# Altium PCB 板3.PcbDoc (part 1 of 3)
Units mm, origin at the board's own origin, x right, y up, seen from the top; angles counter-clockwise.
Board outline 152.4 x 101.6 mm, 4 copper layers (Top Layer, VCC, GND, Bottom Layer); 152 components, 486 nets, 1233 pads, 480 vias.
Unrouted connection lines stored in the file: 1.
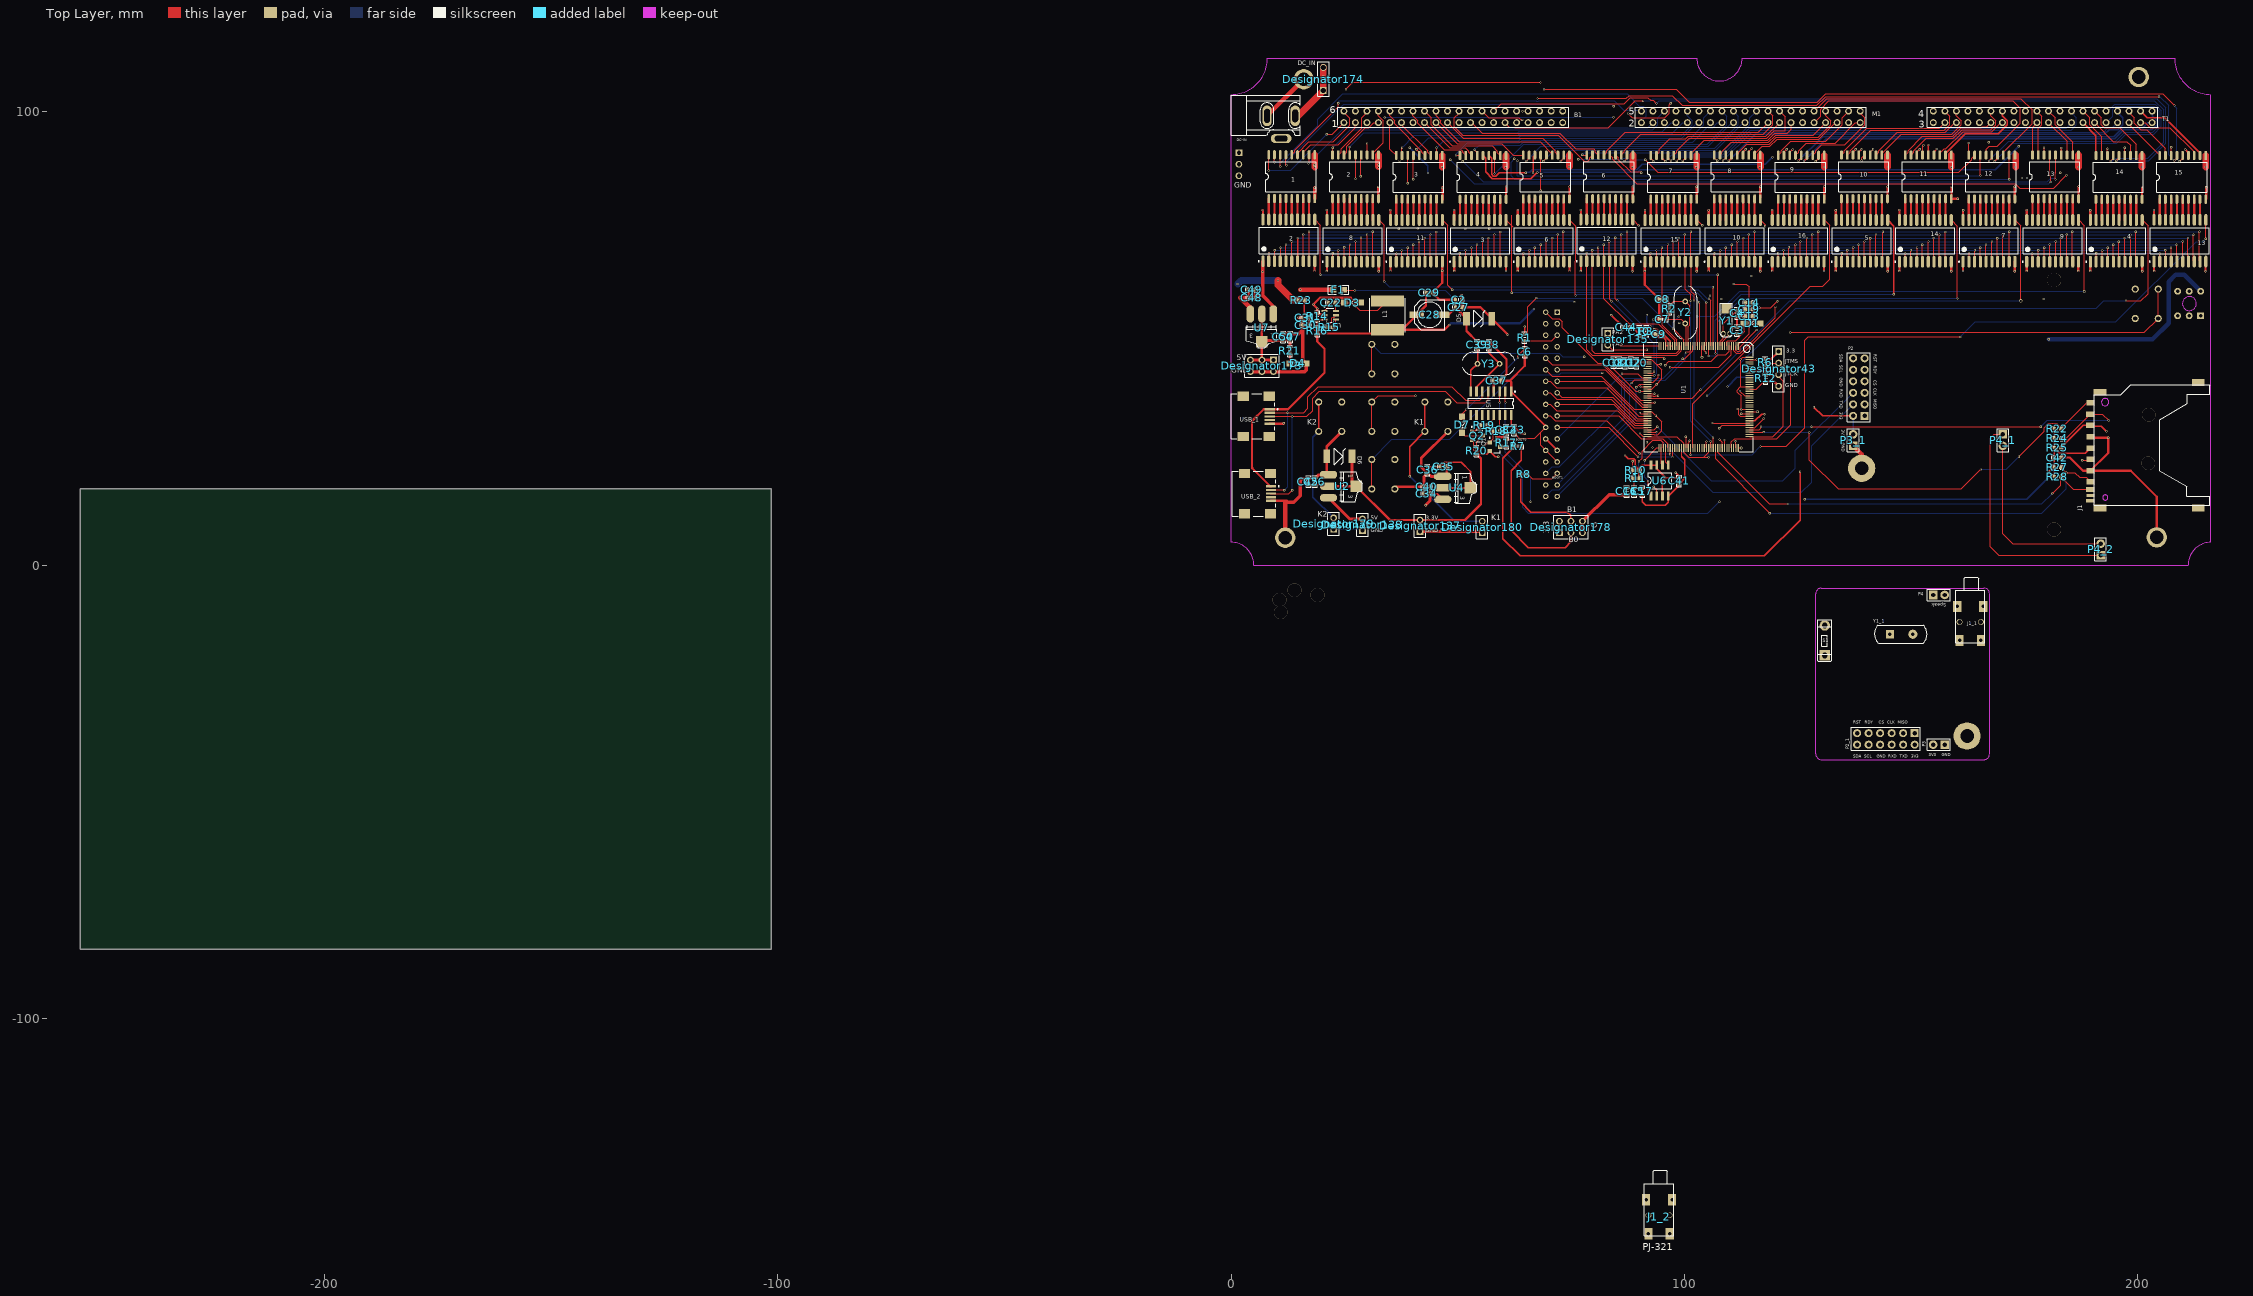
[diagram p0: Top Layer view]
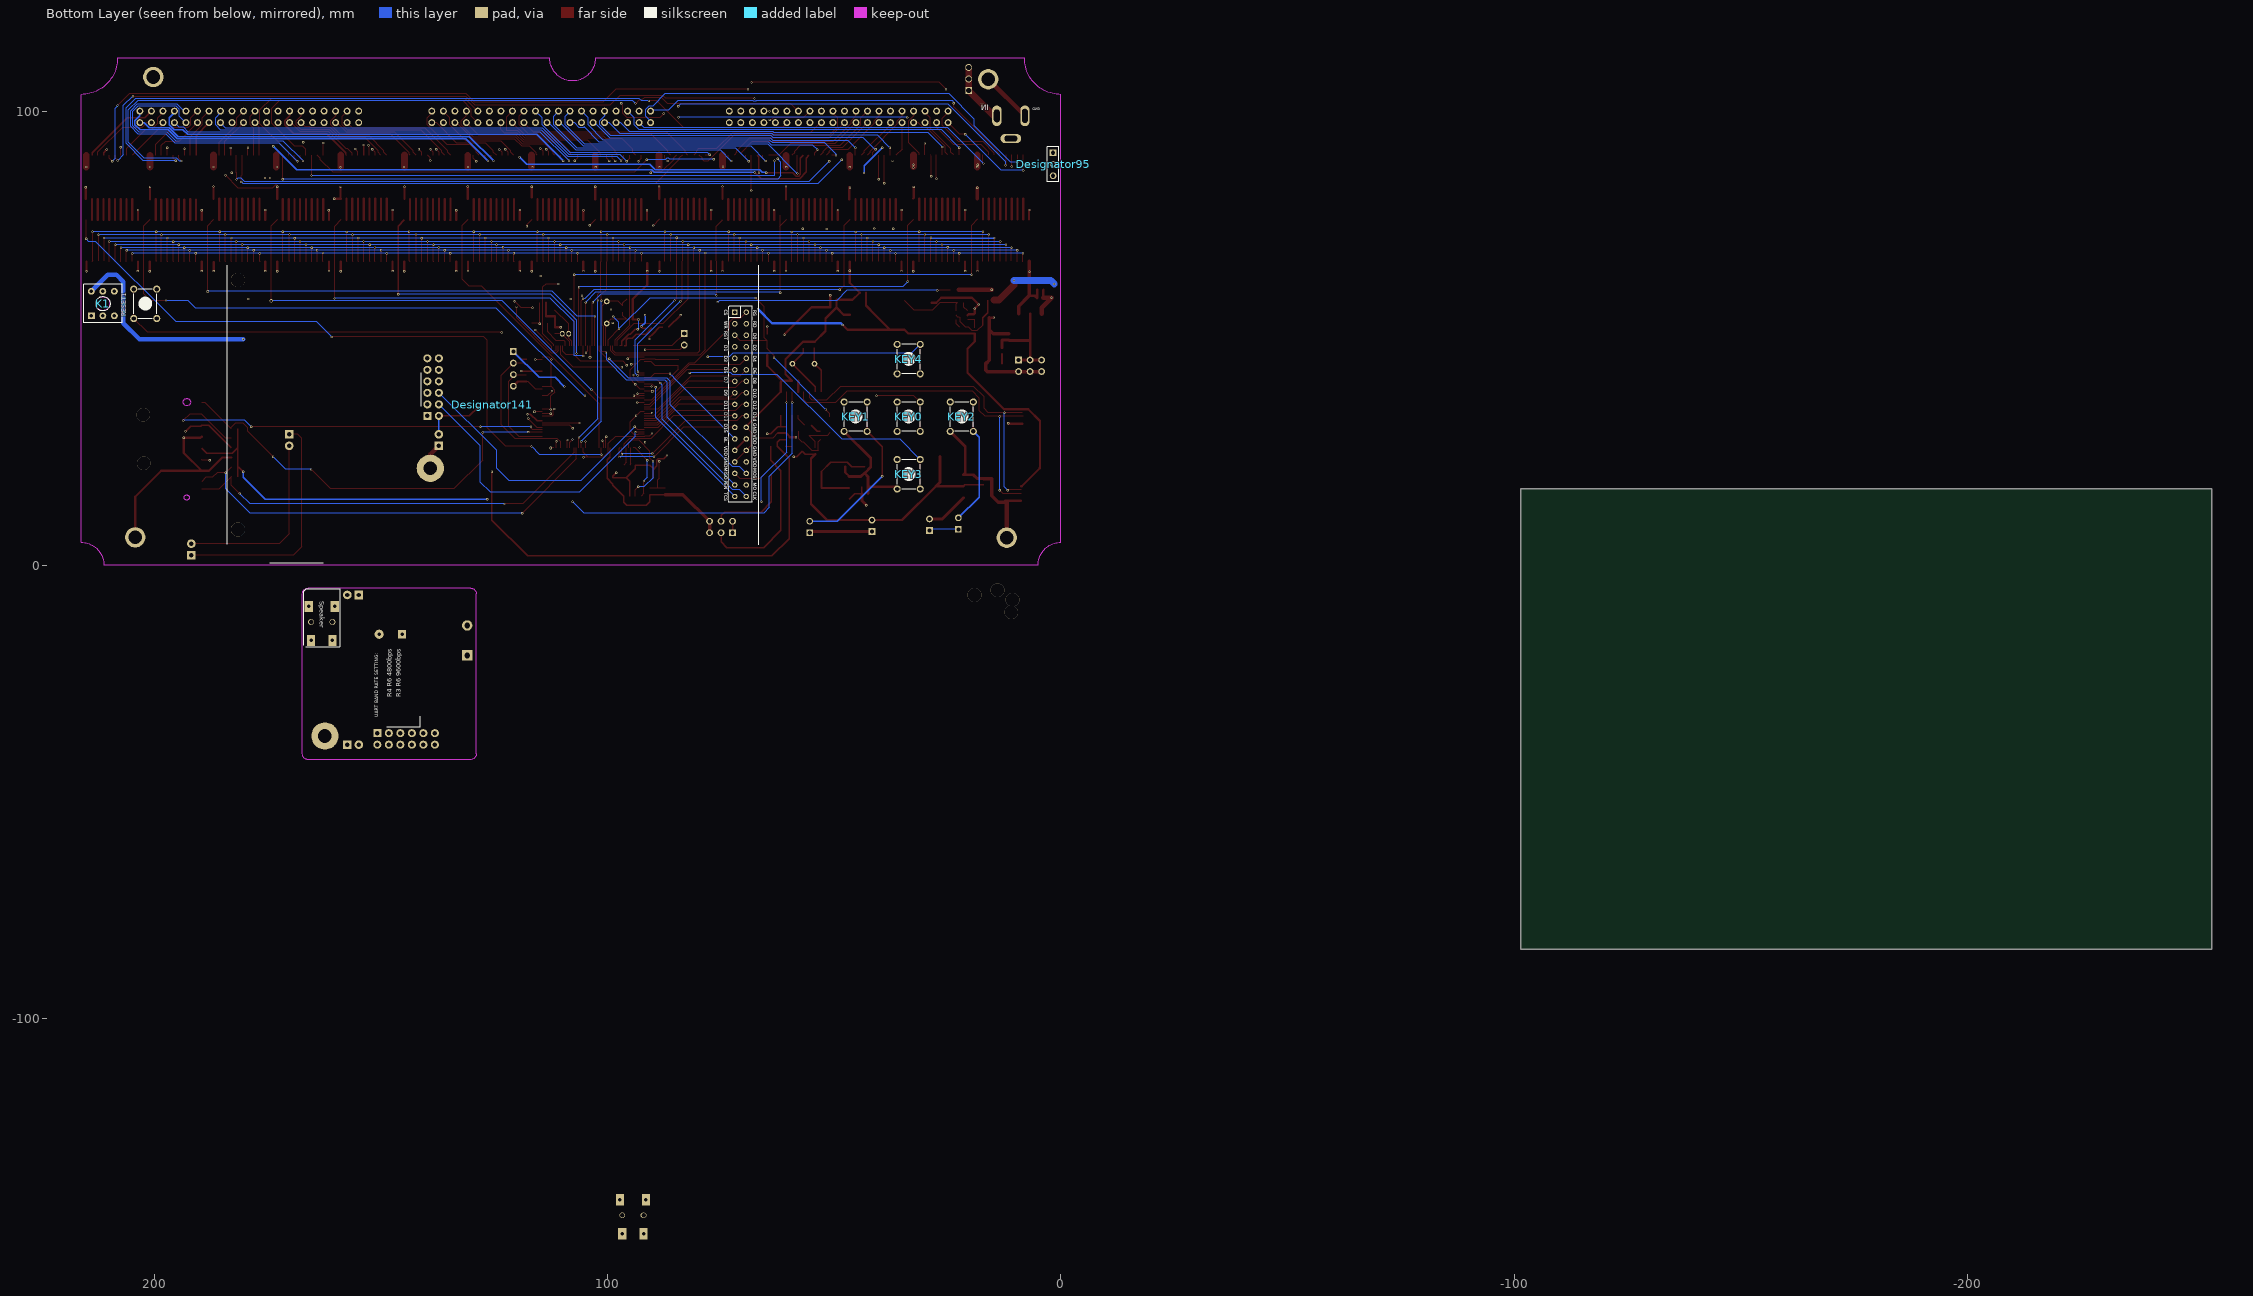
[diagram p1: Bottom Layer view, seen from below]
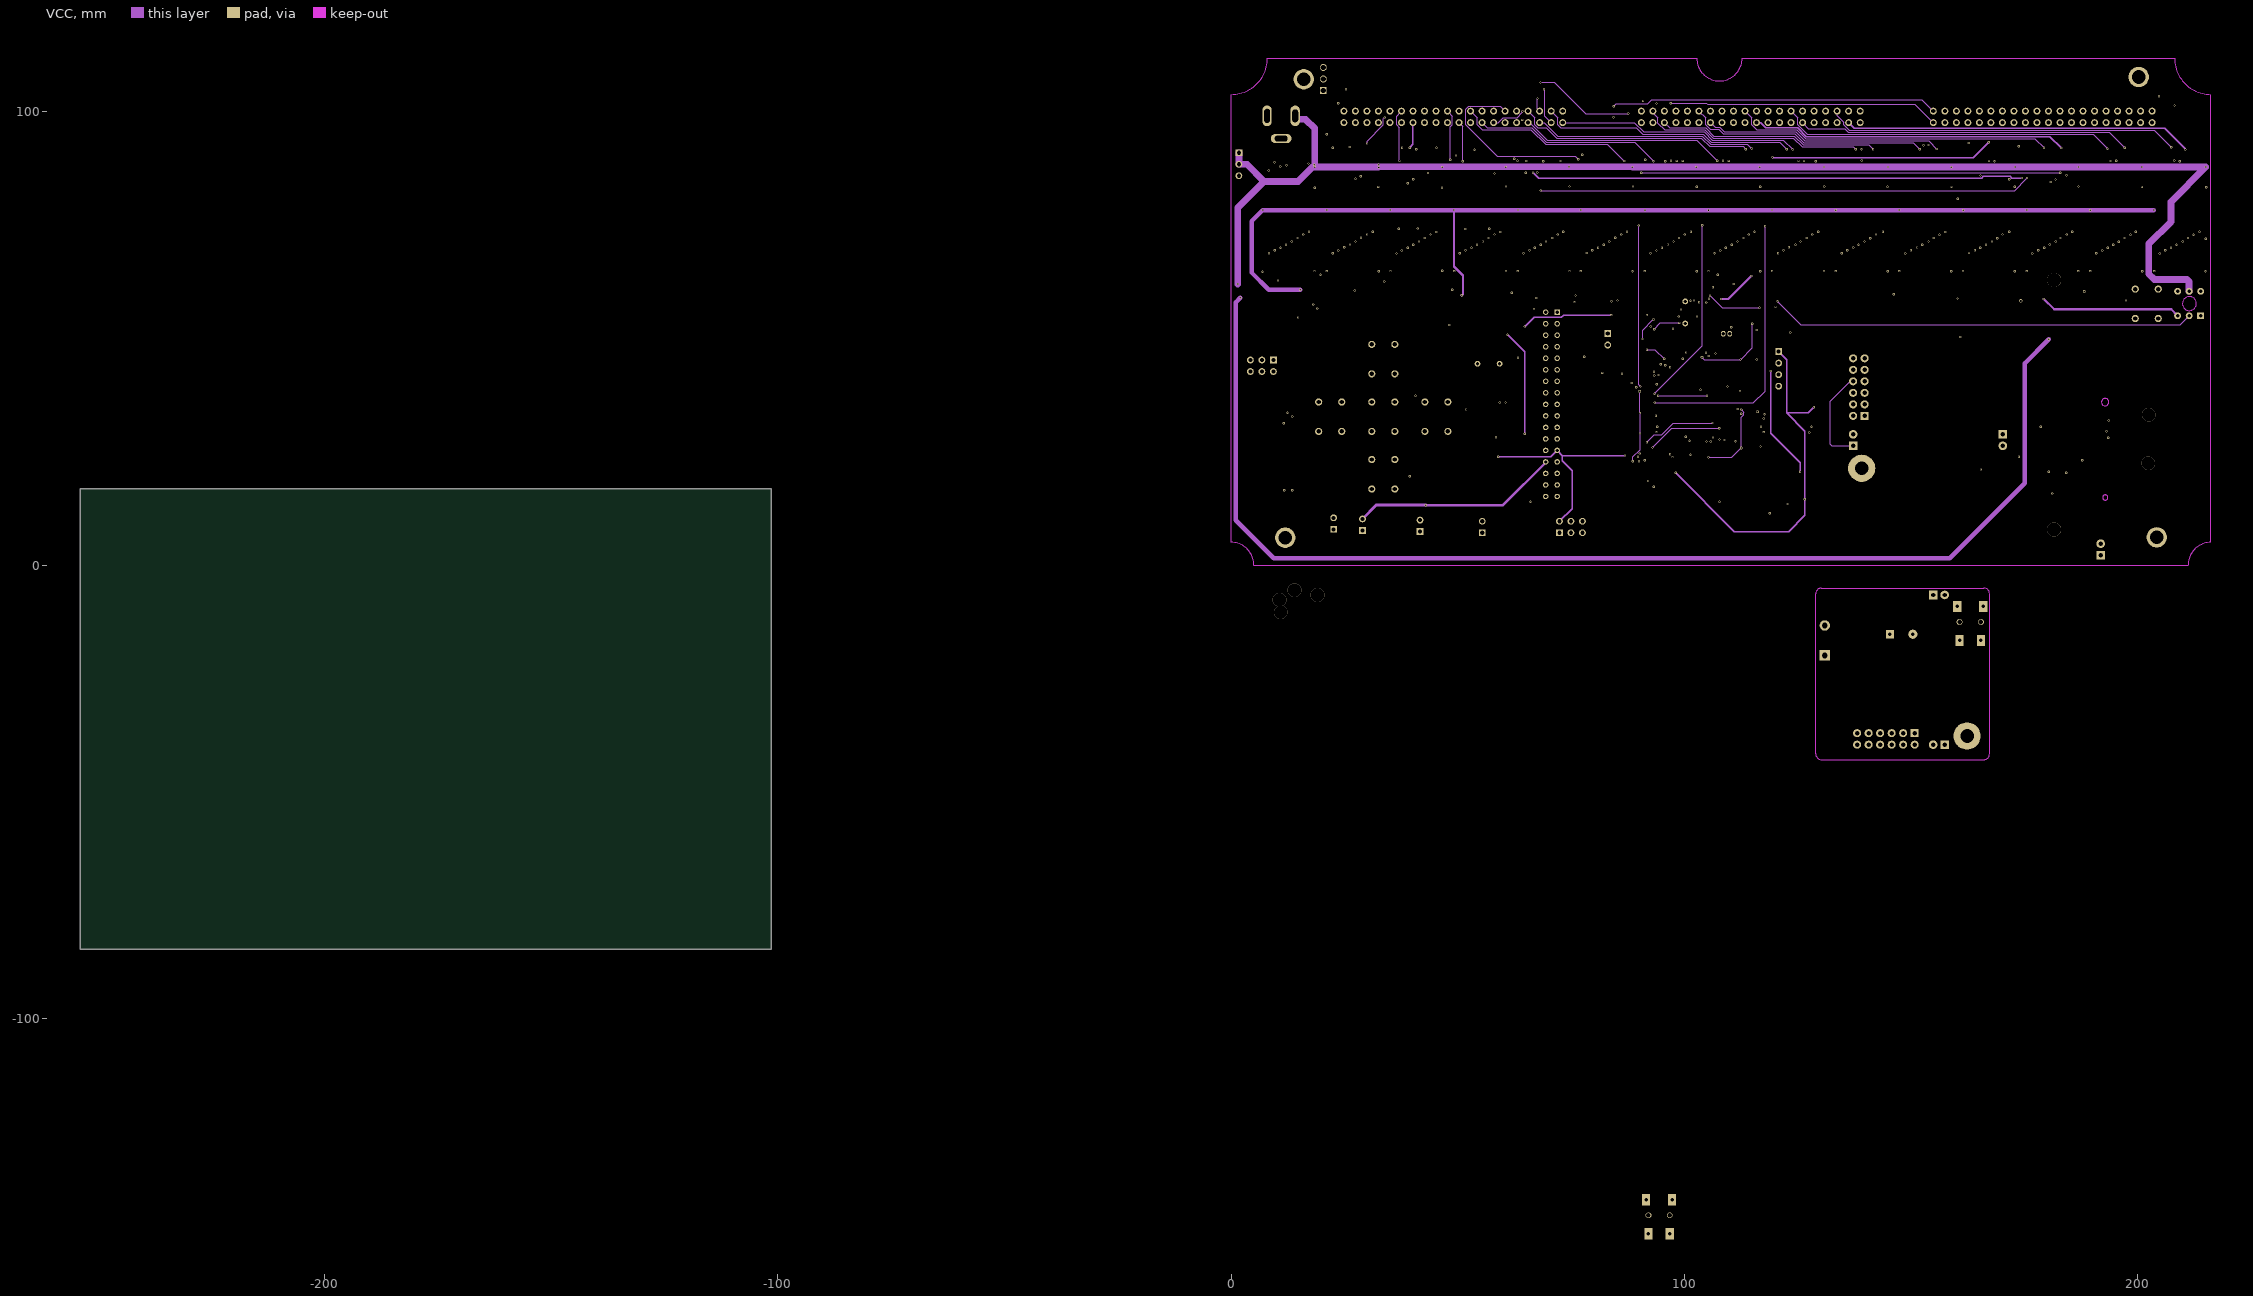
[diagram p2: VCC]
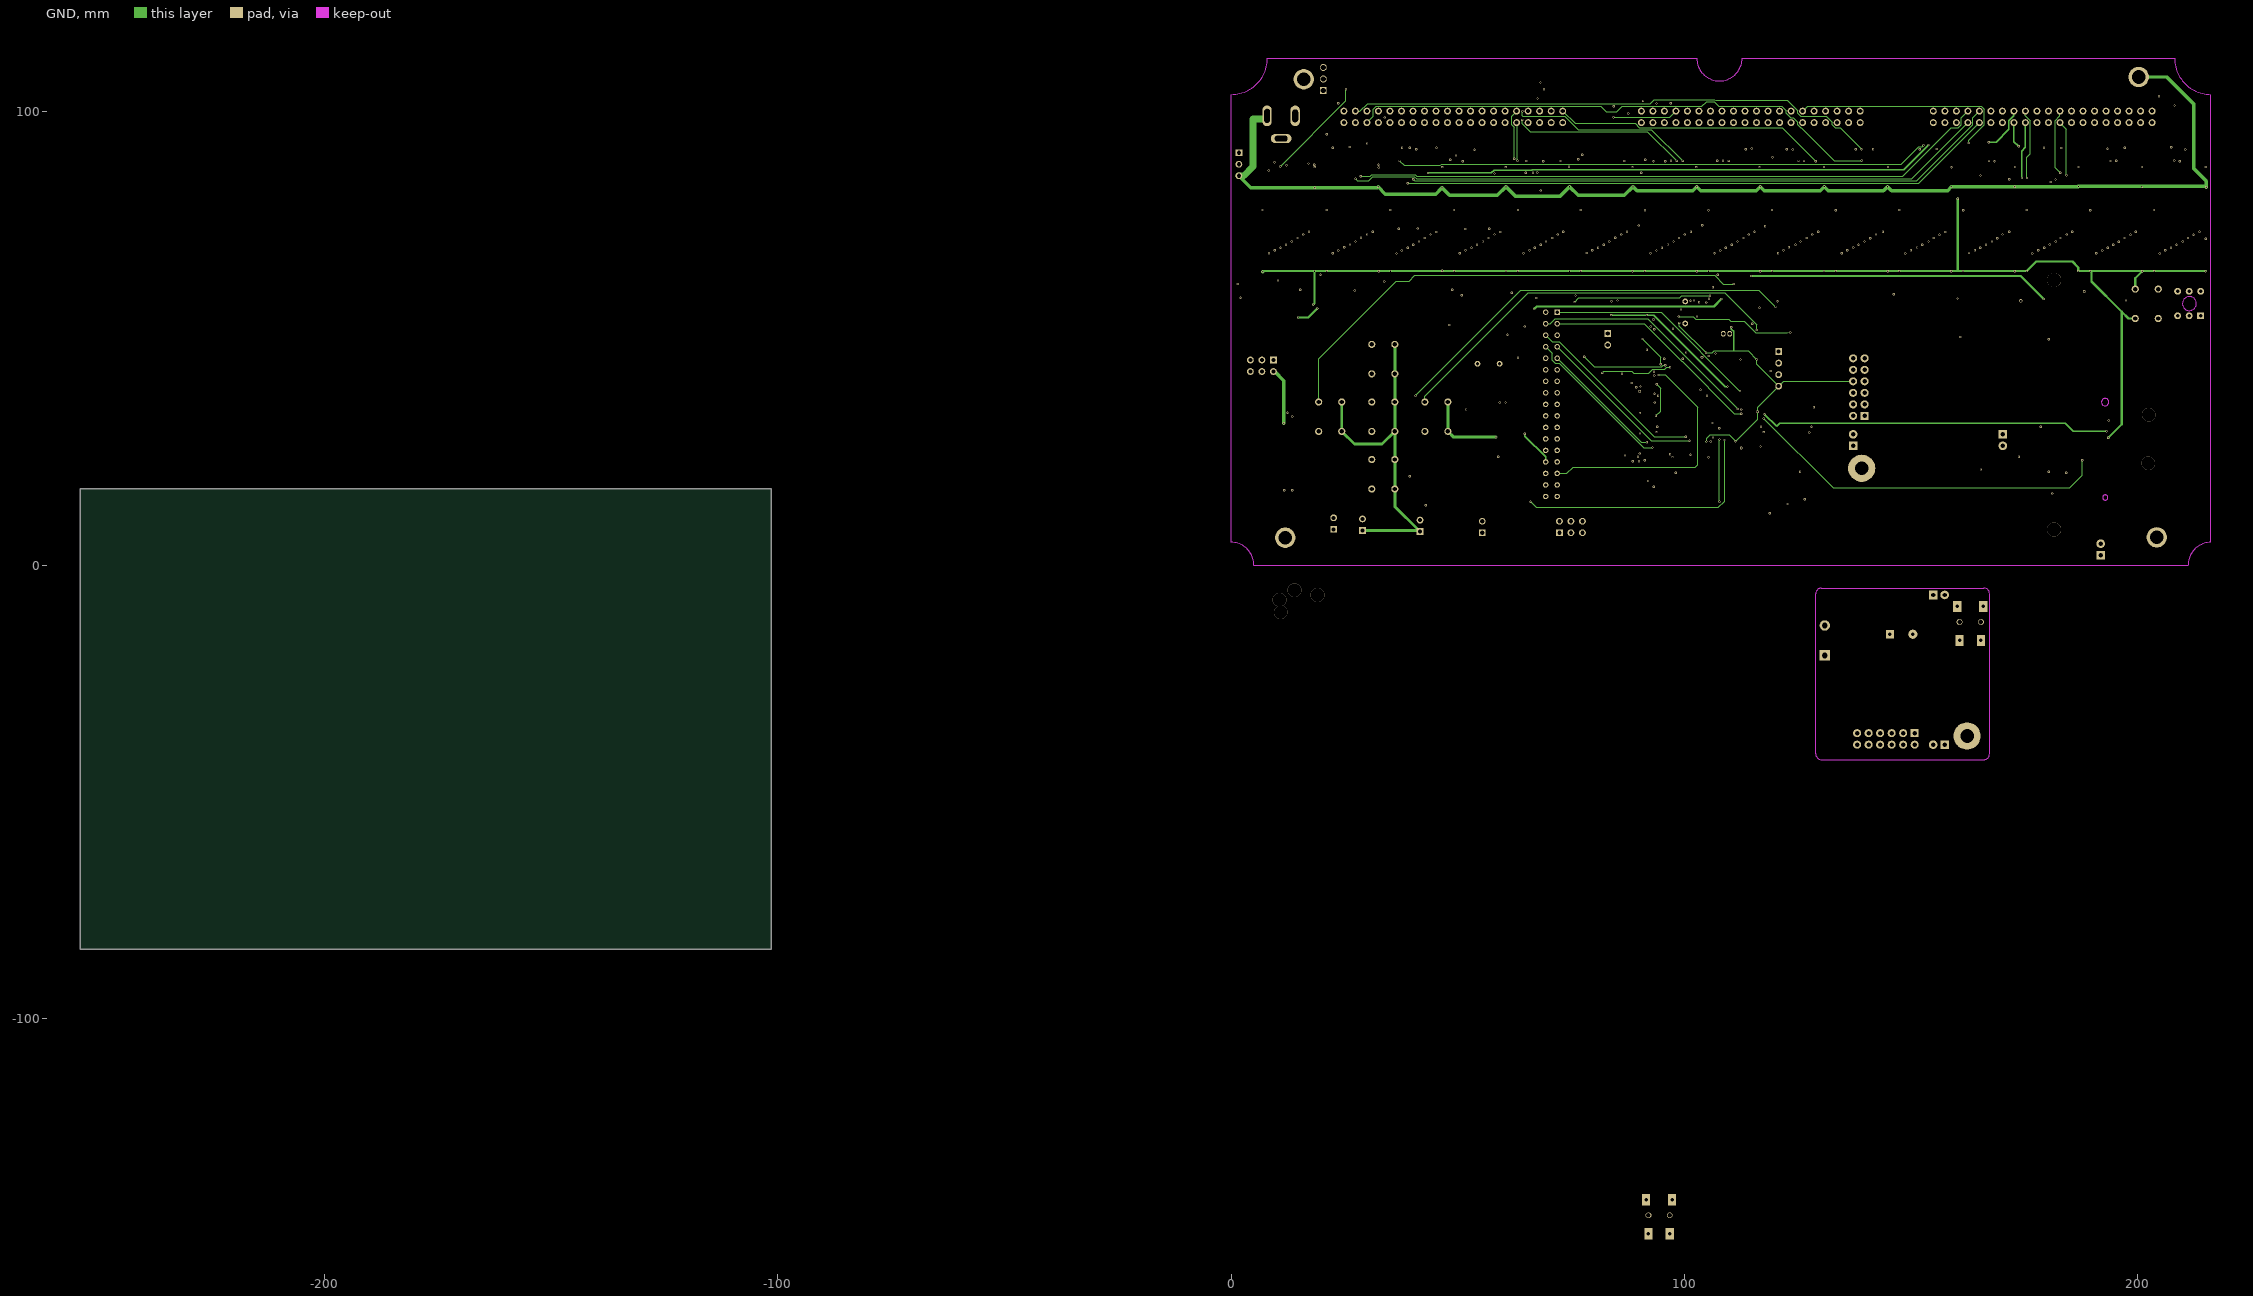
[diagram p3: GND]

## Layer stack, top to bottom
Top Layer: signal copper 0.0356
Dielectric: core 0.32, FR-4, Dk 4.8
VCC: signal copper 0.0356
Dielectric: prepreg 0.32, FR-4, Dk 4.8
GND: signal copper 0.0356
Dielectric: core 0.32, FR-4, Dk 4.8
Bottom Layer: signal copper 0.0356

## Board outline
-253.83,-84.735 -101.43,-84.735 -101.43,16.865 -253.83,16.865

## Design rules (kind name [scope] priority, off if disabled: settings)
Clearance Clearance_1 [InNet('GND')] p1: gap=0.2
Clearance [All] p2: gap=0.2
ComponentClearance [All] p1: gap=0 collisioncheckmode=3 verticalgap=0 showdistances=FALSE
FabricationTestPointUsage TestPointUsage [All] p1: valid=0 allowmultiple=FALSE
FabricationTestpoint Testpoint [(IsPad And (OnTopLayer Or OnBottomLayer))] p1: side=3 testpointundercomponent=TRUE minsize=1.016 maxsize=2.54 preferedsize=1.524 minholesize=0 maxholesize=1.016 preferedholesize=0.813 testpointgrid=0.025 allowsidetop=TRUE allowsidebottom=TRUE usegrid=TRUE gridtolerance=0
PolygonConnect [All] p1: connectstyle=Relief reliefconductorwidth=0.254 reliefentries=4 polygonreliefangle="90 Angle" airgapwidth=0.254
RoutingCorners [All] p1: cornerstyle=Round minsetback=2.54 maxsetback=2.54
RoutingVias [All] p1: holewidth=0.3 width=0.5 viastyle="Through Hole" minholewidth=0.3 minwidth=0.5 maxholewidth=0.7 maxwidth=0.7
SolderMaskExpansion [All] p1: expansion=0.102
Width [All] p1: maxlimit=5 minlimit=0.2 preferedwidth=3 toplayer_prefwidth=0.2 midlayer1_minwidth=0.254 midlayer1_maxwidth=3 midlayer1_prefwidth=0.254 midlayer2_minwidth=0.254 midlayer2_maxwidth=3 midlayer2_prefwidth=0.254 minimp=50.000000 maximp=50.000000 favimp=50.000000
24 further rules are at their usual default settings.

## Classes and differential pairs
component class SHEET2: 2 3 4 5 6 8 9 10 11 12 13 14 15 16 573_1 573_2 573_3 573_4 573_5 573_6 573_7 573_8 573_9 573_10 573_11 573_12 573_13 573_14 573_15 B DY4 Jzong M T
component class SHEET3: C83 C84 C85 C86 C87 C88 C89 C90 C92 C93 C94 C95 C96 C97 C98 C99 D3 D5 D6 D7 DC_IN K1 L1 Q2 R67 R68 R69 R70 R71 U16 U17 U18 U19 USB_232
component class Sheet4: BEEP C41 C42 C44 CAN DS0 DS1 KEY0 KEY1 KEY2 "KEY UP" P13 P14 R22 R24 R25 R27 R28 SYS TPAD TPAD1 U6 U15 USB
component class SHEET1: 2.4/2.8LCD BAT BOOT C2 C3 C4 C7 C8 C9 C10 C11 D1 D2 JTAG R2 R3 RESET Y1

## Components (designator, comment, footprint, x,y, rotation, side; value= is the part's Value field where it differs from the comment)
1 "uln2803" sol-18 8.28,80.823 r90 top (schematic designator FD1)
2 "74HC573" SO20_M 12.725,71.603 r90 top
2 "uln2803" sol-18 22.352,80.797 r90 top (schematic designator FD7)
3 "74HC573" SO20_M 54.889,71.501 r90 top
3 "uln2803" sol-18 36.398,80.696 r90 top (schematic designator FD10)
4 "74HC573" SO20_M 195.206,71.501 r90 top
4 "uln2803" sol-18 50.47,80.67 r90 top (schematic designator FD2)
5 "74HC573" SO20_M 139.079,71.501 r90 top
5 "uln2803" sol-18 64.44,80.747 r90 top (schematic designator FD5)
6 "74HC573" SO20_M 68.921,71.501 r90 top
6 "uln2803" sol-18 78.435,80.772 r90 top (schematic designator FD11)
7 "74HC573" SO20_M 167.142,71.501 r90 top
7 "uln2803" sol-18 92.532,80.696 r90 top (schematic designator FD14)
8 "74HC573" SO20_M 26.825,71.501 r90 top
8 "uln2803" sol-18 106.553,80.747 r90 top (schematic designator FD9)
9 "74HC573" SO20_M 181.174,71.501 r90 top
9 "uln2803" sol-18 120.65,80.721 r90 top (schematic designator FD15)
10 "74HC573" SO20_M 111.016,71.501 r90 top
10 "uln2803" sol-18 134.595,80.772 r90 top (schematic designator FD4)
11 "74HC573" SO20_M 40.857,71.501 r90 top
11 "uln2803" sol-18 148.666,80.772 r90 top (schematic designator FD13)
12 "74HC573" SO20_M 82.855,71.603 r90 top
12 "uln2803" sol-18 162.687,80.747 r90 top (schematic designator FD6)
13 "74HC573" SO20_M 209.245,71.526 r90 top
13 "uln2803" sol-18 176.733,80.772 r90 top (schematic designator FD8)
14 "74HC573" SO20_M 153.111,71.501 r90 top
14 "uln2803" sol-18 190.729,80.67 r90 top (schematic designator FD3)
15 "74HC573" SO20_M 96.984,71.501 r90 top
15 "uln2803" sol-18 204.775,80.67 r90 top (schematic designator FD12)
16 "74HC573" SO20_M 125.047,71.501 r90 top
B1 "dubangxian" 杜邦线插脚 24.859,100.101 r0 top
C2 "104" 0603P 50.165,58.496 r0 top
C3 "10" 0603P 111.582,51.74 r270 top
C4 "10" 0603P 111.582,55.524 r90 top
C6 "104" 0603P 64.77,47.015 r90 top
C7 "22" 0603P 95.072,54.153 r0 top
C8 "22" 0603P 95.079,58.649 r0 top
C9 "10uF" 0603P 94.31,50.876 r180 top
C10 "104" 0603P 90.043,51.587 r90 top
C11 "104" 0603P 85.598,44.628 r90 top
C12 "104" 0603P 88.138,44.628 r90 top
C13 "104" 0603P 114.224,54.839 r180 top
C14 "104" 0603P 114.224,57.836 r180 top
C15 "104" 0603P 88.9,16.231 r270 top
C16 "104" 0603P 87.249,16.231 r270 top
C17 "104" 0603P 90.678,16.231 r270 top
C18 "104" 0603P 84.328,44.628 r90 top
C19 "104" 0603P 114.224,56.388 r180 top
C20 "104" 0603P 89.408,44.602 r90 top
C21 "104" 0603P 86.893,44.602 r90 top
C22 "103" 0603P 22.098,57.887 r0 top
C26 "104" 0603P 18.44,18.365 r270 top
C27 "104" 0603P 50.165,56.845 r0 top
C28 "220uF" CC6.56.5 43.764,55.194 r0 top
C29 "104" 0603P 43.688,60.071 r180 top
C30 "104" 0603P 16.485,52.934 r0 top
C31 "104" 0603P 16.485,54.508 r0 top
C32 "104" 0603P 60.681,29.794 r270 top
C34 "104" 0603P 43.18,15.748 r0 top
C35 "104" 0603P 46.838,21.667 r180 top
C36 "10uf" 0603P 43.332,20.981 r90 top
C37 "104" 0603P 58.623,40.665 r180 top
C38 "22" 0603P 56.845,48.539 r270 top
C39 "22" 0603P 54.28,48.539 r270 top
C40 "104" 0603P 43.18,17.272 r0 top
C41 "104" 0603P 98.806,18.542 r270 top
C42 "104" 0603P 182.245,23.693 r180 top
C43 "10u" 0603P 62.382,29.82 r270 top
C44 "104" 0603P 87.122,52.4 r180 top
C45 "104" 0603P 17.043,18.365 r270 top (schematic designator C26)
C47 "104" 0603P 12.954,50.292 r90 top (schematic designator C26)
C48 "104" 0603P 4.572,58.928 r0 top (schematic designator C26)
C49 "104" 0603P 4.488,60.706 r0 top (schematic designator C26)
C50 "106" 0603P 11.43,50.292 r90 top (schematic designator C26)
D1 "1N4148" DIODE_SOP 116.688,53.289 r180 top
D3 "SS14" DIODE_SOP 28.499,57.861 r180 top
D4 "SS14" DIODE_SOP 12.954,44.45 r0 top (schematic designator D3)
D5 "SMBJ5.0A" SMBJ 54.559,54.356 r0 top
D6 "SMBJ5.0A" SMBJ 23.749,23.953 r0 top
D7 "1N4148" DIODE_SOP 50.927,32.715 r270 top
DC_IN "POWER" DC10B 3.472,94.742 r0 top
Designator43 "ss14" HDR1X4 120.752,47.066 r270 top
Designator95 "" HDR1X3#1 1.694,90.932 r270 bottom
Designator135 "" HDR1X2#1 83.058,51.054 r270 top
Designator137 "" HDR1X2#1 41.656,7.366 r90 top
Designator138 "" HDR1X2#1 28.956,7.62 r90 top
Designator141 "" db2*17-4.3 71.907,55.753 r270 bottom locked
Designator173 "" HDR2X3 9.314,45.212 r180 top
Designator174 "" HDR1X3#2 20.32,104.648 r90 top
Designator178 "" HDR2X3 72.39,7.112 r0 top
Designator179 "" HDR1X2#1 22.606,7.874 r90 top
Designator180 "" HDR1X2#1 55.372,7.112 r90 top
F1 "500MA" 0805 22.522,60.706 r0 top
J1 "SDCARD" SDCARD_L 189.484,33.274 r90 top
J1_1 "PJ-325C" PJ-321 162.941,-11.684 r270 top (schematic designator J1)
J1_2 "PJ-321" PCBComponent_1 828.497,503.149 r0 top (schematic designator J1)
K1 "BUTTON" BTN8.5*8.5 213.817,54.966 r90 bottom
KEY0 "KEY_M" KEY_M 36.093,29.464 r90 bottom
KEY1 "KEY_M" KEY_M 47.803,29.464 r90 bottom
KEY2 "KEY_M" KEY_M 24.384,29.464 r90 bottom
KEY3 "KEY_M" KEY_M 36.093,16.764 r90 bottom (schematic designator KEY0)
KEY4 "KEY_M" KEY_M 36.093,42.164 r90 bottom (schematic designator KEY0)
L1 "4.7uH" L_SOP74 34.468,51.892 r90 top
M1 "dubangxian" 杜邦线插脚 90.467,100.101 r0 top
P2 "Header 6X2A" HDR2X6_CEN 139.7,32.893 r90 top locked
P2_1 "Header 6X2A" HDR2X6_CEN 150.749,-37.084 r180 top (schematic designator P2)
P3 "Header 2" HDR1X2#2 157.353,-39.624 r180 top
P3_1 "Header 2" HDR1X2#2 137.16,26.289 r90 top locked (schematic designator P3)
P4 "Header 2" HDR1X2#2 154.813,-6.604 r0 top
P4_1 "Header 2" HDR1X2#2 170.18,28.829 r270 top locked (schematic designator P4)
P4_2 "Header 2" HDR1X2#2 191.77,2.159 r90 top locked (schematic designator P4)
Q1 "S8550" SOT-23R 58.064,26.086 r270 top
Q2 "S8050" SOT-23R 54.153,28.524 r270 top
R1 "10K" 0603P 64.719,50.14 r90 top
R2 "1M" 0603P 96.622,56.464 r90 top
R3 "10R" 0603P 91.592,51.562 r90 top
R6 "10K" 0603P 117.78,44.679 r270 top
R7 "10K" 0603P 63.246,26.162 r0 top
R8 "10K" 0603P 64.516,20.066 r180 top (schematic designator R7)
R10 "0" 0603P 89.256,20.93 r180 top
R11 "0" 0603P 89.256,19.126 r180 top
R12 "10K" 0603P 117.856,41.148 r90 top
R14 "9.53K" 0603P 18.999,54.813 r90 top
R15 "100K" 0603P 21.641,52.451 r0 top
R16 "49.9K" 0603P 18.999,51.664 r90 top
R17 "1K" 0603P 60.706,26.924 r90 top
R18 "1K" 0603P 58.522,29.515 r180 top
R19 "1K" 0603P 55.778,30.785 r180 top
R20 "10K" 0603P 54.127,25.146 r90 top
R21 "100K" 0603P 12.954,47.244 r270 top (schematic designator R15)
R22 "47k" 0603P 182.245,30.048 r180 top
R23 "0" 0603P 15.41,58.42 r180 top (schematic designator R14)
R24 "47k" 0603P 182.245,27.93 r180 top
R25 "47k" 0603P 182.245,25.811 r180 top
R27 "47k" 0603P 182.245,21.575 r180 top
R28 "47k" 0603P 182.245,19.456 r180 top
RESET1 "KEY_M" KEY_M 204.47,54.356 r90 bottom
S1 "KEY_" KEY2 130.937,-16.764 r90 top
T1 "dubangxian" 杜邦线插脚 154.856,100.101 r0 top
U1 "STM32F103ZET6" LQFP144 111.822,48.303 r270 top
U2 "AMS1117-3.3" AMS1117 21.463,19.914 r270 top
U3 "MP2359" SOT-23-6 20.574,56.032 r0 top
U4 "AMS1117-1.8" AMS1117 46.685,19.559 r270 top
U5 "CH340G" SOP16M 57.302,35.636 r180 top
U6 "W25Q128" SOIC-8 92.583,15.189 r90 top
U7 "AMS1117-5.0" AMS1117 9.314,55.372 r180 top (schematic designator U2)
USB_1 "USB" USB/SM0.8-6H5 0.678,32.766 r180 top
USB_2 "USB" USB/SM0.8-6H5 0.932,15.748 r180 top (schematic designator USB_1)
Y1 "32.768K" XTAL32 108.534,51.029 r90 top
Y1_1 "XTAL_1" XTAL 147.803,-15.265 r0 top (schematic designator Y1)
Y2 "8MHz" XTAL_US 100.152,53.264 r90 top
Y3 "12.288MHz" XTAL_US 59.207,44.399 r180 top

## Footprints (in the part's own frame and the unit in brackets; to place one, negate y for a bottom-side part, rotate by r counter-clockwise, add the part's x,y. Pads: shape width x height; smd on the part's side, far side on the other; paste and mask are expansions set on the pad)
0603P [mil]
  rect 30x30 smd: 1(-27,0) 2(27.5,-0.06)
  silkscreen extent -50,-20 50,20
0805 [mil]
  rect 60x50 smd: 1(0,0) 2(90,0)
  silkscreen extent -45,-40 135,40
AMS1117 [mil]
  oct 65x150 smd: 1(0.03,-0.06)
  oval 65x150 smd: 2(100.03,-0.06) 3(200.03,-0.06)
  rect 100x100 smd: 4(100.03,239.94)
  silkscreen extent -26,100 234,293
BTN8.5*8.5 [mm]
  rect 1.5x1.5 hole 0.8: 1(0,0)
  round 1.5 hole 0.8: 2(0,-2.54) 3(0,-5.08) 4(5.4,-5.08) 5(5.4,-2.54) 6(5.4,0)
  silkscreen extent -1.55,-6.79 6.95,1.71
CC6.56.5 [mm]
  rect 3.2x1.5 smd: 1(-2.794,0) 2(2.8,0)
  silkscreen extent -3.3,-3.3 3.3,3.3
db2*17-4.3 [mm]
  rect 1.2x1.2 hole 0.7: 1(-0.002,0.006)
  round 1.2 hole 0.7: 2(-0.002,2.546) 3(2.538,0.006) 4(2.538,2.546) 5(5.08,0) 6(5.078,2.546) 7(7.62,0) 8(7.62,2.54) 9(10.158,0.006) 10(10.158,2.546) 11(12.698,0.006) 12(12.698,2.546) 13(15.238,0.006) 14(15.238,2.546) 15(17.778,0.006) 16(17.778,2.546) 17(20.318,0.006) 18(20.318,2.546) 19(22.858,0.006) 20(22.858,2.546) 21(25.398,0.006) 22(25.398,2.546) 23(27.938,0.006) 24(27.938,2.546) 25(30.478,0.006) 26(30.478,2.546) 27(33.018,0.006) 28(33.018,2.546) 29(35.558,0.006) 30(35.558,2.546) 31(38.098,0.006) 32(38.098,2.546) 33(40.638,0.006) 34(40.638,2.546)
  round 3.1 hole 3.1: ""(-7.125,-109.596) ""(47.925,-109.596)
  silkscreen extent -10.4,-111.89 51.25,5.33
DC10B [mil]
  oval 80x180 hole 50 slot 110 at 90 deg: 1(419.09,170)
  oval 80x180 hole 50 slot 120 at 90 deg: 2(175,170)
  oval 180x80 hole 50 slot 110 at 0 deg: 3(297.05,-26.85)
  silkscreen extent -138,0 465,350
DIODE_SOP [mm]
  rect 1.5x1.3 smd: 1(0,0) 2(3.556,0)
  silkscreen extent 1.14,-1.02 2.56,1.02
HDR1X2#1 [mm] "Connector; Header; 2 Position"
  rect 1.5x1.5 hole 0.9: 1(0,0)
  round 1.5 hole 0.9: 2(2.54,0)
  silkscreen extent -1.27,-1.27 3.81,1.27
HDR1X2#2 [mm] "Connector; Header; 2 Position"
  rect 1.905x1.905 hole 0.965: 1(0,0)
  round 1.905 hole 0.965: 2(2.54,0)
  silkscreen extent -1.27,-1.27 3.81,1.27
HDR1X3#1 [mm] "Connector; Header; 3 Position"
  rect 1.5x1.5 hole 0.9: 1(0,0)
  round 1.5 hole 0.9: 2(2.54,0) 3(5.08,0)
  silkscreen extent -1.27,-1.27 6.35,1.27
HDR1X3#2 [mm] "Connector; Header; 3 Position"
  rect 1.5x1.5 hole 1.2: 1(0,0)
  round 1.5 hole 1.2: 2(2.54,0) 3(5.08,0)
  silkscreen extent -1.27,-1.27 6.35,1.27
HDR1X4 [mm] "Connector; Header; 4 Position"
  rect 1.5x1.5 hole 0.9: 1(0,0)
  round 1.5 hole 0.9: 2(2.54,0) 3(5.08,0) 4(7.62,0)
  silkscreen extent -1.27,-1.27 8.89,1.27
HDR2X3 [mm] "Connector; Header; 3x2 Position"
  rect 1.5x1.5 hole 0.9: 1(0,0)
  round 1.5 hole 0.9: 2(0,2.54) 3(2.54,0) 4(2.54,2.54) 5(5.08,0) 6(5.08,2.54)
  silkscreen extent -1.27,-1.27 6.35,3.81
HDR2X6_CEN [mil] "Connector; Header; 6x2 Position"
  rect 70x70 hole 38: 1(0,0)
  round 70 hole 38: 2(100,0) 3(200,0) 4(300,0) 5(400,0) 6(500,0) 7(0,100) 8(100,100) 9(200,100) 10(300,100) 11(400,100) 12(500,100)
  silkscreen extent -50,-50 550,150
KEY2 [mil]
  rect 90x90 hole 50: 1(-125,0)
  round 90 hole 50: 2(135,0)
  silkscreen extent -175,-60 185,60
KEY_M [mil]
  round 62 hole 38: 1(0,0) 1(255.9,0) 2(0,-200) 2(255.9,-200)
  silkscreen extent 0,-200 255,0
L_SOP74 [mm]
  rect 2.5x7.2 smd: 1(0,0) 2(6.35,0)
  silkscreen extent -0.51,-3.94 6.89,3.94
LQFP144 [mm]
  rect 1.8x0.254 smd: 1(-0.009,0.001) 2(-0.009,-0.499) 3(-0.009,-0.999) 4(-0.009,-1.499) 5(-0.009,-1.999) 6(-0.009,-2.499) 7(-0.009,-2.999) 8(-0.009,-3.499) 9(-0.009,-3.999) 10(-0.009,-4.499) 11(-0.009,-4.999) 12(-0.009,-5.499) 13(-0.009,-5.999) 14(-0.009,-6.499) 15(-0.009,-6.999) 16(-0.009,-7.499) 17(-0.009,-7.999) 18(-0.009,-8.499) 19(-0.009,-8.999) 20(-0.009,-9.499) 21(-0.009,-9.999) 22(-0.009,-10.499) 23(-0.009,-10.999) 24(-0.009,-11.499) 25(-0.009,-11.999) 26(-0.009,-12.499) 27(-0.009,-12.999) 28(-0.009,-13.499) 29(-0.009,-13.999) 30(-0.009,-14.499) 31(-0.009,-14.999) 32(-0.009,-15.499) 33(-0.009,-15.999) 34(-0.009,-16.499) 35(-0.009,-16.999) 36(-0.009,-17.499) 73(22.491,-17.499) 74(22.491,-16.999) 75(22.491,-16.499) 76(22.491,-15.999) 77(22.491,-15.499) 78(22.491,-14.999) 79(22.491,-14.499) 80(22.491,-13.999) 81(22.491,-13.499) 82(22.491,-12.999) 83(22.491,-12.499) 84(22.491,-11.999) 85(22.491,-11.499) 86(22.491,-10.999) 87(22.491,-10.499) 88(22.491,-9.999) 89(22.491,-9.499) 90(22.491,-8.999) 91(22.491,-8.499) 92(22.491,-7.999) 93(22.491,-7.499) 94(22.491,-6.999) 95(22.491,-6.499) 96(22.491,-5.999) 97(22.491,-5.499) 98(22.491,-4.999) 99(22.491,-4.499) 100(22.491,-3.999) 101(22.491,-3.499) 102(22.491,-2.999) 103(22.491,-2.499) 104(22.491,-1.999) 105(22.491,-1.499) 106(22.491,-0.999) 107(22.491,-0.499) 108(22.491,0.001)
  rect 0.254x1.8 smd: 37(2.491,-19.999) 38(2.991,-19.999) 39(3.491,-19.999) 40(3.991,-19.999) 41(4.491,-19.999) 42(4.991,-19.999) 43(5.491,-19.999) 44(5.991,-19.999) 45(6.491,-19.999) 46(6.991,-19.999) 47(7.491,-19.999) 48(7.991,-19.999) 49(8.491,-19.999) 50(8.991,-19.999) 51(9.491,-19.999) 52(9.991,-19.999) 53(10.491,-19.999) 54(10.991,-19.999) 55(11.491,-19.999) 56(11.991,-19.999) 57(12.491,-19.999) 58(12.991,-19.999) 59(13.491,-19.999) 60(13.991,-19.999) 61(14.491,-19.999) 62(14.991,-19.999) 63(15.491,-19.999) 64(15.991,-19.999) 65(16.491,-19.999) 66(16.991,-19.999) 67(17.491,-19.999) 68(17.991,-19.999) 69(18.491,-19.999) 70(18.991,-19.999) 71(19.491,-19.999) 72(19.991,-19.999) 109(19.991,2.501) 110(19.491,2.501) 111(18.991,2.501) 112(18.491,2.501) 113(17.991,2.501) 114(17.491,2.501) 115(16.991,2.501) 116(16.491,2.501) 117(15.991,2.501) 118(15.491,2.501) 119(14.991,2.501) 120(14.491,2.501) 121(13.991,2.501) 122(13.491,2.501) 123(12.991,2.501) 124(12.491,2.501) 125(11.991,2.501) 126(11.491,2.501) 127(10.991,2.501) 128(10.491,2.501) 129(9.991,2.501) 130(9.491,2.501) 131(8.991,2.501) 132(8.491,2.501) 133(7.991,2.501) 134(7.491,2.501) 135(6.991,2.501) 136(6.491,2.501) 137(5.991,2.501) 138(5.491,2.501) 139(4.991,2.501) 140(4.491,2.501) 141(3.991,2.501) 142(3.491,2.501) 143(2.991,2.501) 144(2.491,2.501)
  silkscreen extent -0.81,-20.8 23.29,3.3
PCBComponent_1 [mil]
  rect 70.87x98.43 hole 30: 2(-28995,-25615) 3(-28810,-25615) 4(-29015,-25320) 4(-28790,-25320)
  silkscreen extent -29030,-25635 -28775,-25065
PJ-321 [mil]
  rect 98.43x70.87 hole 30: 2(195,-90) 3(195,95) 4(-100,115) 4(-100,-110)
  silkscreen extent -355,-125 215,130
SDCARD_L [mm]
  rect 1.2x1.8 smd: 1(0,0) 2(-2.489,0) 3(-4.983,-0.009) 4(-7.483,-0.009) 5(-9.983,-0.009) 6(-12.483,-0.009) 7(-14.908,-0.009) 9(2.517,-0.009)
  rect 1.1x1.8 smd: 8(-16.612,0)
  rect 0.7x1.8 smd: 10(-17.908,-0.009) 12(-19.101,0)
  rect 1.5x2.8 smd: 11(-20.726,-2.143) 11(-20.726,-23.834) 11(4.826,-2.143) 11(7.01,-23.784)
  Keep-Out Layer circle w0.254: c2.642,-3.26 r0.82
  Keep-Out Layer circle w0.254: c-18.39,-3.3 r0.58
  silkscreen extent -20.13,-26.3 6.44,-0.9
SMBJ [mm]
  rect 1.5x3 smd: 1(-2.667,0) 2(2.921,0)
  silkscreen extent -1.02,-1.85 1.52,1.83
SO20_M [mm] "SOIC, 20-Leads, Body 12.8x7.5mm, Pitch 1.27mm, IPC Low Density"
  oval 2.6x0.7 smd: 1(-4.6,5.715) 2(-4.6,4.445) 3(-4.6,3.175) 4(-4.6,1.905) 5(-4.6,0.635) 6(-4.6,-0.635) 7(-4.6,-1.905) 8(-4.6,-3.175) 9(-4.6,-4.445) 10(-4.6,-5.715) 11(4.6,-5.715) 12(4.6,-4.445) 13(4.6,-3.175) 14(4.6,-1.905) 15(4.6,-0.635) 16(4.6,0.635) 17(4.6,1.905) 18(4.6,3.175) 19(4.6,4.445) 20(4.6,5.715)
  silkscreen extent -4.72,-6.5 2.9,6.74, body extent -3.75,-6.5 3.75,6.5, height 2.65
SOIC-8 [mil]
  rect 80x24 smd: 1(0,0) 2(0,-50.06) 3(0,-100.06) 4(0,-150.06) 5(270,-150) 6(270,-100) 7(270,-50) 8(270,0)
  silkscreen extent 65,-175 205,25
sol-18 [mil]
  oval 80x24 smd: 1(0,0) 2(0,-50) 3(0,-100) 4(0,-150) 5(0,-200) 6(0,-250) 7(0,-300) 8(0,-350) 9(0,-400) 10(380,-400) 11(380,-350) 12(380,-300) 13(380,-250) 14(380,-200) 15(380,-150) 16(380,-100) 17(380,-50) 18(380,0)
  silkscreen extent 60,-412 320,25
SOP16M [mm]
  rect 0.6x2.2 smd: 1(-4.445,-2.6) 2(-3.175,-2.6) 3(-1.905,-2.6) 4(-0.635,-2.6) 5(0.635,-2.6) 6(1.905,-2.6) 7(3.175,-2.6) 8(4.445,-2.6) 9(4.445,2.6) 10(3.175,2.6) 11(1.905,2.6) 12(0.635,2.6) 13(-0.635,2.6) 14(-1.905,2.6) 15(-3.175,2.6) 16(-4.445,2.6)
  silkscreen extent -5.42,-2.72 5,1.1
SOT-23-6 [mil]
  rect 50x20 smd: 1(0,0) 2(0,-37.4) 3(0,-74.8) 4(100,-74.8) 5(100,-37.4) 6(100,0)
  silkscreen extent 0,-99 80,35
SOT-23R [mm]
  rect 0.9x0.95 smd: 1(0.95,-1.048) 2(-0.95,-1.048) 3(0,1.302)
  silkscreen extent -2.07,-1.17 1.3,1.3
USB/SM0.8-6H5 [mm]
  rect 2.3x0.5 smd: 1(-7.85,-1.6) 2(-7.85,-0.8) 3(-7.85,0) 4(-7.85,0.8) 5(-7.85,1.6)
  rect 2.5x2 smd: 6(-7.75,4.45) 7(-1.996,4.45) 8(-7.75,-4.45) 9(-1.996,-4.45)
  round 0.6 hole 1.27 unplated: MH1(-5.25,2.2) MH2(-5.25,-2.2)
  silkscreen extent -9.68,-4.95 0.7,4.95
XTAL [mil]
  rect 70x70 hole 30: 1(-100,0)
  round 80 hole 30: 2(100,0)
  silkscreen extent -233,-80 223,80
XTAL32 [mil]
  oval 50x40 hole 27.99: 1(0,0.01) 2(0,-56.02)
  rect 92.13x86 smd: ""(220,-27)
  silkscreen extent -28,-77 264,25
XTAL_US [mil]
  round 50 hole 28: 1(0,0) 2(192.13,0)
  silkscreen extent -131,-98 323,98
杜邦线插脚 [mil]
  round 60 hole 36: 1(0,-100) 2(100,-100) 3(200,-100) 4(300,-100) 5(400,-100) 6(500,-100) 7(600,-100) 8(700,-100) 9(800,-100) 10(900,-100) 11(1000,-100) 12(1100,-100) 13(1200,-100) 14(1300,-100) 15(1400,-100) 16(1500,-100) 17(1600,-100) 18(1700,-100) 19(1800,-100) 20(1900,-100) 21(0,0) 22(100,0) 23(200,0) 24(300,0) 25(400,0) 26(500,0) 27(600,0) 28(700,0) 29(800,0) 30(900,0) 31(1000,0) 32(1100,0) 33(1200,0) 34(1300,0) 35(1400,0) 36(1500,0) 37(1600,0) 38(1700,0) 39(1800,0) 40(1900,0)
  silkscreen extent -53,-142 1951,35

## Part data
2 3 4 5 6 7 8 9 10 11 12 13 14 15 16: library part SN74HC573DW, "Octal D-Type Transparent Latch with 3-State Outputs"
C2 C3 C4 C6 C7 C8 C9 C10 C11 C12 C13 C14 C15 C16 C17 C18 C19 C20 C21 C22 C26 C27 C29 C30 C31 C32 C34 C35 C36 C37 C38 C39 C40 C41 C42 C43 C44 C45 C47 C48 C49 C50: library part C
C28: library part CAP
D1: library part D, "Typical RED, GREEN, YELLOW, AMBER GaAs LED"
D3 D4 D7: library part D
D5 D6: library part SMBJ, "TVS"
DC_IN: library part POW
F1 R1 R2 R3 R6 R7 R8 R10 R11 R12 R14 R15 R16 R17 R18 R19 R20 R21 R23: library part R
J1: "SD卡自弹"
J1_1: "Jack Socket, 1/4\" [6.5mm], Thru-Hole, Vertical, 3-Conductor with Tip closed & Ring open"
L1: library part L_SOP
P2 P2_1: "Header, 6-Pin, Dual row"
P3 P3_1 P4 P4_1 P4_2: "Header, 2-Pin"
Q1: library part PNP, "8550/BCW68"
Q2: library part NPN, "8050/BCW846/BCW847"
R22 R24 R25 R27 R28: library part Res1, "贴片电阻"
S1: "Switch"
U2 U4 U7: library part AMS1117
U3: "DC DC Step Down IC"
U5: "USB2UART"
U6: library part W25X16, "W25X16;SST25VF016;MX25L1605"
USB_1 USB_2: library part USB5
Y1: library part XTAL_1, "Crystal Oscillator"
Y1_1: library part XTAL1, "晶振"
Y2: library part XTAL, "Crystal Oscillator"
Y3: library part XTAL_2, "Crystal Oscillator"

## Free pads (board coordinates)
  round 6 hole 3: 0(139.065,21.336) 0(162.306,-37.719)
  round 4.5 hole 3: 1(11.934,6.035) 1(15.998,107.127) 1(200.148,107.635) 1(204.132,6.096)
  round 0.6 hole 0.4: 15(103.835,45.822) 38(90.068,38.278) 41(112.497,25.806) 69(116.103,33.782) 71(188.163,60.342) 72(93.142,54.153)

## Via types
v1: diameter 0.5, hole 0.3, Top Layer to Bottom Layer, 465 vias
v2: diameter 3, hole 3, Top Layer to Bottom Layer, tented both sides, 6 vias
v3: diameter 1.27, hole 1.016, Top Layer to Bottom Layer, 4 vias
v4: diameter 1, hole 1, Top Layer to Bottom Layer, 4 vias
v5: diameter 0.8, hole 0.5, Top Layer to Bottom Layer, 1 vias

## Nets (pads, with @x,y where several pads share a name; then routed paths per layer and width w, separated by ;. In a path a pad name is that pad's centre, name@x,y a point inside that pad or via, vN(x,y) a via of type N, cw(c..) or ccw(c..) an arc to the next point about the centre after c; other vN are vias at no path point)
5V: C47.1 C50.1 Designator173.1 Designator173.3 Designator173.5 R21.1 U7.2 U7.4 | length 23.2
  Top Layer w0.3: U7.4@6.773,49.278 U7.4@7.026,49.53
  Top Layer w0.6: Designator173.5@4.234,45.212 Designator173.3@6.774,45.212 Designator173.1@9.314,45.212 ; Designator173.3@6.774,45.212 U7.4@6.773,49.278 U7.2@6.773,55.374 ; U7.4@7.026,49.53 C50.1@11.43,49.53 ; C50.1@11.43,49.606 C47.1@12.954,49.606 R21.1@12.954,47.93
"A OUTR": 
AREF: 
"ASEL A": 
"ASEL B": U1.137
AVDD: 
B0: Designator178.3 R7.2 | length 36.8
  Top Layer w0.3: R7.2@63.944,26.16 63.944,23.05 61.722,20.828 61.722,7.62 65.532,3.81 73.66,3.81 74.93,5.08 Designator178.3@74.93,7.112
B1: Designator178.4 R8.2 | length 19.8
  Top Layer w0.3: R8.2@63.817,20.068 63.817,13.906 66.04,11.684 74.168,11.684 74.93,10.922 Designator178.4@74.93,9.652
BEEP: U1.139
BN0: 
BOOT0: R7.1 R17.2 U1.138 | length 134.9
  Top Layer w0.3: R17.2@60.708,27.622 62.039,27.622 62.56,27.102 R7.1@62.56,26.162 59.944,23.546 59.944,5.842 63.754,2.032 117.602,2.032 125.476,9.906 v1(125.476,20.574) ; U1.138@114.402,42.789 v1(118.984,42.789)
  VCC w0.3: v1(118.984,42.789) 118.984,29.098 125.476,22.606 v1(125.476,20.574)
BOOT1: Designator141.29 R8.1 U1.48 | length 67
  Top Layer w0.254: R8.1@65.278,20.142 66.37,19.05 70.756,19.05 Designator141.29@71.901,20.195 ; U1.48@91.823,40.312 93.144,40.312 94.234,41.402 v1(94.234,41.91)
  GND w0.254: Designator141.29@71.901,20.195 74.043,20.195 75.438,21.59 102.362,21.59 102.87,22.098 102.87,34.798 95.758,41.91 v1(94.234,41.91)
BP0: 
"CAN RX": 
"CAN TX": 
"CD X0": 
"CD X1": 
"CD XY2": 
"CD Y0": 
"CD Y1": 
"CH340 D+": U5.5 USB_1.3 USB_2.3 | length 76.7
  Top Layer w0.254: USB_1.3@8.298,32.766 v1(13.462,32.766) 16.68,32.766 17.95,34.036 17.95,36.83 19.474,38.354 47.244,38.354 49.784,35.814 56.05,35.814 56.667,36.431 U5.5@56.667,38.236 ; USB_2.3@8.782,15.748 12.7,15.748 v1(13.462,16.51)
  Bottom Layer w0.254: v1(13.462,16.51) v1(13.462,32.766)
"CH340 D-": U5.6 USB_1.2 USB_2.2 | length 73.8
  Top Layer w0.254: USB_1.2@8.528,33.566 v1(12.446,33.566) 15.956,33.566 16.934,34.544 16.934,37.084 19.22,39.37 48.684,39.37 51.732,36.322 54.78,36.322 55.397,36.939 U5.6@55.397,38.236 ; USB_2.2@8.782,16.548 v1@11.646,16.548
  Bottom Layer w0.254: v1(11.684,16.51) 12.446,17.272 v1(12.446,33.566)
CVDD: C35.2 C36.2 U4.2 U4.4 | length 20.4
  Top Layer w0.4: C36.2@43.334,21.68 C35.2@46.128,21.68 ; C35.2@46.139,21.669 47.128,22.658 50.748,22.658 52.78,20.626 U4.4@52.78,17.018 U4.2@46.684,17.018
D1: 2.2@8.28,67.003 3.2@50.444,66.901 4.2@190.761,66.901 5.2@134.634,66.901 6.2@64.476,66.901 7.2@162.697,66.901 8.2@22.38,66.901 9.2@176.729,66.901 10.2@106.571,66.901 11.2@36.412,66.901 12.2@78.41,67.003 13.2@204.8,66.926 14.2@148.666,66.901 15.2@92.539,66.901 16.2 U1.26 | length 266.5
  Top Layer w0.2: 2.2@8.357,66.901 v1(8.357,68.783) v1@8.357,68.859 ; 8.2@22.38,66.901 v1@22.38,68.761 ; 11.2@36.412,66.901 36.449,66.938 v1(36.449,68.707) ; 3.2@50.419,66.926 v1(50.419,68.732) ; 6.2@64.465,66.911 v1(64.465,68.758) ; v1(78.41,68.809) 78.41,64.77 78.41,47.523 79.648,46.285 98.313,46.285 99.25,47.222 U1.26@99.25,48.312 ; 15.2@92.481,66.958 v1(92.481,68.732) ; 10.2@106.578,66.909 v1(106.578,68.758) ; 16.2@120.602,66.901 120.625,66.923 v1(120.625,68.758) ; 5.2@134.634,66.901 134.671,66.938 v1(134.671,68.732) ; v1(148.641,68.707) 148.641,66.926 14.2@148.666,66.901 ; 7.2@162.697,66.901 162.738,66.941 v1(162.738,68.834) ; v1(176.682,68.707) 176.682,66.947 9.2@176.729,66.901 ; 4.2@190.761,66.901 190.805,66.945 v1(190.805,68.758) ; 13.2@204.775,66.952 v1(204.775,68.707)
  Bottom Layer w0.2: v1@8.331,68.707 v1@8.357,68.707 ; v1(8.357,68.783) v1(22.403,68.783) ; v1@22.403,68.707 v1(36.449,68.707) 50.394,68.707 v1(50.419,68.732) ; v1@50.419,68.707 v1(148.641,68.707) 162.611,68.707 v1(162.738,68.834) ; v1@162.738,68.707 v1(176.682,68.707) 190.754,68.707 v1(190.805,68.758) ; v1@190.805,68.707 v1(204.775,68.707)
D2: 2.3@9.55,67.003 3.3@51.714,66.901 4.3@192.031,66.901 5.3@135.904,66.901 6.3@65.746,66.901 7.3@163.967,66.901 8.3@23.65,66.901 9.3@177.999,66.901 10.3@107.841,66.901 11.3@37.682,66.901 12.3@79.68,67.003 13.3@206.07,66.926 14.3@149.936,66.901 15.3@93.809,66.901 16.3 U1.27 | length 273.6
  Top Layer w0.2: 2.3@9.627,66.901 v1(9.627,69.393) ; 8.3@23.65,66.901 v1@23.65,69.339 ; 11.3@37.617,66.966 v1(37.617,69.367) ; 3.3@51.689,66.926 v1(51.689,69.393) ; 6.3@65.786,66.941 v1(65.786,69.393) ; 12.3@79.654,67.028 v1(79.654,69.393) ; 12.3@79.68,67.003 79.68,47.269 80.213,46.736 98.199,46.736 98.823,47.36 U1.27@98.823,48.312 ; 15.3@93.828,66.919 v1(93.828,69.367) ; 10.3@107.874,66.934 v1(107.874,69.367) ; 16.3@121.818,66.955 v1(121.818,69.393) ; v1(135.89,69.393) 135.89,66.915 5.3@135.904,66.901 ; v1(149.911,69.393) 149.911,66.926 14.3@149.936,66.901 ; 7.3@163.967,66.901 164.033,66.967 v1(164.033,69.393) ; v1(177.978,69.393) 177.978,66.922 9.3@177.999,66.901 ; 4.3@192.031,66.901 192.126,66.996 v1(192.126,69.367) ; 13.3@206.07,66.926 v1@206.07,69.317
  Bottom Layer w0.2: v1(9.627,69.393) 23.597,69.393 v1(23.622,69.367) ; v1@23.622,69.393 v1(51.689,69.393) v1(65.786,69.393) v1(79.654,69.393) 93.802,69.393 v1(93.828,69.367) ; v1@93.828,69.393 v1(121.818,69.393) v1(135.89,69.393) v1(149.911,69.393) v1(164.033,69.393) v1(177.978,69.393) 178.003,69.367 v1(192.126,69.367) ; v1@192.126,69.393 v1(205.994,69.393)
D3: 2.4@10.82,67.003 3.4@52.984,66.901 4.4@193.301,66.901 5.4@137.174,66.901 6.4@67.016,66.901 7.4@165.237,66.901 8.4@24.92,66.901 9.4@179.269,66.901 10.4@109.111,66.901 11.4@38.952,66.901 12.4@80.95,67.003 13.4@207.34,66.926 14.4@151.206,66.901 15.4@95.079,66.901 16.4 U1.28 | length 262.4
  Top Layer w0.2: 2.4@10.897,67.079 v1(10.897,69.977) ; 8.4@24.92,66.901 v1@24.92,70.005 ; 11.4@38.938,66.915 v1(38.938,69.977) ; 3.4@53.01,66.927 v1(53.01,69.977) ; 6.4@66.954,66.962 v1(66.954,69.977) ; 12.4@80.924,67.028 v1(80.924,69.977) ; v1(94.996,69.977) 94.996,66.984 15.4@95.079,66.901 95.079,52.883 98.323,49.639 U1.28@98.323,48.312 ; v1(109.068,69.977) 109.068,66.944 10.4@109.111,66.901 ; v1(123.012,70.053) 123.012,67.031 16.4@123.142,66.901 ; 5.4@137.174,66.901 137.185,66.912 v1(137.185,70.028) ; 14.4@151.206,66.901 151.282,66.978 v1(151.282,70.028) ; v1(165.202,69.977) 165.202,66.937 7.4@165.237,66.901 ; 9.4@179.269,66.901 179.299,66.93 v1(179.299,69.977) ; 4.4@193.301,66.901 193.345,66.945 v1(193.345,69.977) ; 13.4@207.34,66.926 v1@207.34,69.901
  Bottom Layer w0.2: v1(10.897,69.977) 24.892,69.977 v1(24.968,70.053) ; v1@24.968,69.977 v1(38.938,69.977) v1(53.01,69.977) v1(66.954,69.977) v1(80.924,69.977) v1(94.996,69.977) v1(109.068,69.977) 122.936,69.977 v1(123.012,70.053) ; v1@123.012,69.977 v1(165.202,69.977) v1(179.299,69.977) v1(193.345,69.977) v1(207.264,69.977)
D4: 2.5@12.09,67.003 3.5@54.254,66.901 4.5@194.571,66.901 5.5@138.444,66.901 6.5@68.286,66.901 7.5@166.507,66.901 8.5@26.19,66.901 9.5@180.539,66.901 10.5@110.381,66.901 11.5@40.222,66.901 12.5@82.22,67.003 13.5@208.61,66.926 14.5@152.476,66.901 15.5@96.349,66.901 16.5 U1.29 | length 281.3
  Top Layer w0.2: 2.5@12.09,67.003 v1(12.09,70.637) ; 8.5@26.19,66.901 v1@26.19,70.691 ; 11.5@40.157,66.966 v1(40.157,70.637) ; 3.5@54.204,66.951 v1(54.204,70.637) ; 6.5@68.25,66.937 v1(68.25,70.637) ; v1(82.194,70.637) 82.194,67.028 12.5@82.22,67.003 82.22,58.725 87.757,53.188 94.209,53.188 97.823,49.573 U1.29@97.823,48.312 ; 15.5@96.317,66.933 v1(96.317,70.688) ; 10.5@110.381,66.901 110.414,66.934 v1(110.414,70.637) ; 16.5@124.412,66.901 124.46,66.949 v1(124.46,70.637) ; v1(138.379,70.637) 138.379,66.966 5.5@138.444,66.901 ; v1(152.4,70.637) 152.4,66.976 14.5@152.476,66.901 ; v1(166.472,70.637) 166.472,66.937 7.5@166.507,66.901 ; v1(180.518,70.688) 180.518,66.922 9.5@180.539,66.901 ; v1(194.539,70.637) 194.539,66.933 4.5@194.571,66.901 ; 13.5@208.509,67.028 v1(208.509,70.637)
  Bottom Layer w0.2: v1(12.09,70.637) 26.137,70.637 v1(26.213,70.714) ; v1@26.213,70.637 v1(40.157,70.637) v1(54.204,70.637) v1(68.25,70.637) v1(82.194,70.637) 96.266,70.637 v1(96.317,70.688) ; v1@96.317,70.637 v1(110.414,70.637) v1(124.46,70.637) v1(138.379,70.637) v1(152.4,70.637) v1(166.472,70.637) 180.467,70.637 v1(180.518,70.688) ; v1@180.518,70.637 v1(194.539,70.637) v1(208.509,70.637)
D5: 2.6@13.36,67.003 3.6@55.524,66.901 4.6@195.841,66.901 5.6@139.714,66.901 6.6@69.556,66.901 7.6@167.777,66.901 8.6@27.46,66.901 9.6@181.809,66.901 10.6@111.651,66.901 11.6@41.492,66.901 12.6@83.49,67.003 13.6@209.88,66.926 14.6@153.746,66.901 15.6@97.619,66.901 16.6 U1.44 | length 292.7
  Top Layer w0.2: 2.6@13.36,67.003 v1@13.36,71.323 ; 11.6@41.427,66.966 v1(41.427,71.349) ; 3.6@55.524,66.901 v1(55.524,71.349) ; 6.6@69.444,67.013 v1(69.444,71.349) ; 12.6@83.414,67.079 v1(83.414,71.349) ; 12.6@83.49,67.003 83.49,58.572 v1(83.896,58.166) ; U1.44@91.823,42.312 92.985,42.312 v1(93.269,42.596) ; 15.6@97.536,66.984 v1(97.536,71.349) ; 10.6@111.651,66.901 111.658,66.909 v1(111.658,71.349) ; v1(125.552,71.349) 125.552,67.031 16.6@125.682,66.901 ; v1(139.675,71.349) 139.675,66.94 5.6@139.714,66.901 ; 14.6@153.746,66.901 153.772,66.927 v1(153.772,71.349) ; 7.6@167.777,66.901 167.792,66.916 v1(167.792,71.349) ; 9.6@181.809,66.901 181.839,66.93 v1(181.839,71.349) ; v1(195.732,71.323) 195.732,67.009 4.6@195.841,66.901 ; 13.6@209.88,66.926 v1(209.88,71.349)
  Top Layer w0.254: 8.6@27.46,66.901 v1@27.46,71.32
  Bottom Layer w0.2: v1(13.386,71.349) v1(27.432,71.349) v1(41.427,71.349) v1(55.524,71.349) v1(69.444,71.349) v1(83.414,71.349) v1(97.536,71.349) v1(111.658,71.349) v1(125.552,71.349) v1(139.675,71.349) v1(153.772,71.349) v1(167.792,71.349) v1(181.839,71.349) 195.707,71.349 v1(195.732,71.323) ; v1(83.896,58.166) 93.269,48.793 v1(93.269,42.596) ; v1@195.732,71.349 v1(209.88,71.349)
D6: 2.7@14.63,67.003 3.7@56.794,66.901 4.7@197.111,66.901 5.7@140.984,66.901 6.7@70.826,66.901 7.7@169.047,66.901 8.7@28.73,66.901 9.7@183.079,66.901 10.7@112.921,66.901 11.7@42.762,66.901 12.7@84.76,67.003 13.7@211.15,66.926 14.7@155.016,66.901 15.7@98.889,66.901 16.7 U1.45 | length 304.8
  Top Layer w0.2: 8.7@28.654,66.901 v1@28.654,72.187 ; 11.7@42.672,66.991 v1(42.672,72.111) ; 3.7@56.744,66.951 v1(56.744,72.111) ; 6.7@70.79,66.937 v1(70.79,72.111) ; 12.7@84.684,67.079 v1(84.684,72.161) ; 12.7@84.76,67.003 84.76,58.776 85.192,58.344 v1(85.192,58.318) ; U1.45@91.823,41.812 v1@93.266,41.812 ; 15.7@98.755,67.035 v1(98.755,72.111) ; 10.7@112.921,66.901 112.979,66.959 v1(112.979,72.111) ; v1(126.949,72.111) 126.949,66.904 16.7@126.952,66.901 ; v1(140.97,72.085) 140.97,66.915 5.7@140.984,66.901 ; v1(154.965,72.136) 154.965,66.951 14.7@155.016,66.901 ; v1(168.935,72.085) 168.935,67.013 7.7@169.047,66.901 ; v1(182.931,72.136) 182.931,67.049 9.7@183.079,66.901 ; v1(197.028,72.111) 197.028,66.984 4.7@197.111,66.901 ; 13.7@211.023,67.053 v1(211.023,72.111)
  Top Layer w0.3: 2.7@14.63,67.003 v1@14.63,72.085
  Bottom Layer w0.2: v1@28.626,72.111 v1(42.672,72.111) v1(56.744,72.111) v1(70.79,72.111) 84.633,72.111 v1(84.684,72.161) ; v1@84.684,72.111 v1(98.755,72.111) v1(112.979,72.111) v1(126.949,72.111) 140.945,72.111 v1(140.97,72.085) ; v1(85.192,58.318) 85.192,58.344 93.819,49.717 93.819,42.308 v1(93.294,41.783) ; v1@140.97,72.111 v1(197.028,72.111) v1(211.023,72.111)
  Bottom Layer w0.3: v1(14.605,72.111) v1@28.55,72.111
  other v1: 28.626,72.187
D7: 2.8@15.9,67.003 3.8@58.064,66.901 4.8@198.381,66.901 5.8@142.254,66.901 6.8@72.096,66.901 7.8@170.317,66.901 8.8@30,66.901 9.8@184.349,66.901 10.8@114.191,66.901 11.8@44.032,66.901 12.8@86.03,67.003 13.8@212.42,66.926 14.8@156.286,66.901 15.8@100.159,66.901 16.8 U1.96 | length 328.7
  Top Layer w0.2: 2.8@15.9,67.003 v1(15.9,72.873) ; 8.8@30,66.901 v1@30,72.844 ; 11.8@43.942,66.991 v1(43.942,72.873) ; 3.8@58.064,66.901 v1(58.064,72.873) ; 6.8@72.034,66.962 v1(72.034,72.873) ; 12.8@86.004,67.028 v1(86.004,72.873) ; 15.8@100.051,67.009 v1(100.051,72.873) ; 15.8@100.159,66.901 100.159,60.852 101.321,59.69 v1(101.321,58.268) ; v1(105.791,27.254) 105.791,25.844 U1.96@105.823,25.812 ; v1(114.148,72.873) 114.148,66.944 10.8@114.191,66.901 ; v1(128.168,72.873) 128.168,66.955 16.8@128.222,66.901 ; v1(142.215,72.873) 142.215,66.94 5.8@142.254,66.901 ; v1(156.21,72.847) 156.21,66.976 14.8@156.286,66.901 ; v1(170.129,72.873) 170.129,67.089 7.8@170.317,66.901 ; v1(184.277,72.873) 184.277,66.973 9.8@184.349,66.901 ; 4.8@198.381,66.901 v1@198.381,72.815 ; 13.8@212.217,67.13 v1(212.217,72.847)
  Bottom Layer w0.2: v1(15.9,72.873) v1(29.972,72.873) ; v1@29.972,72.847 v1(156.21,72.847) 170.104,72.847 v1(170.129,72.873) ; v1(101.321,58.268) 101.321,31.725 v1(105.791,27.254) ; v1@170.129,72.847 v1(198.349,72.847) v1(212.217,72.847) v1@212.242,72.847
D8: 2.9@17.17,67.003 3.9@59.334,66.901 4.9@199.651,66.901 5.9@143.524,66.901 6.9@73.366,66.901 7.9@171.587,66.901 8.9@31.27,66.901 9.9@185.619,66.901 10.9@115.461,66.901 11.9@45.302,66.901 12.9@87.3,67.003 13.9@213.69,66.926 14.9@157.556,66.901 15.9@101.429,66.901 16.9 U1.97 | length 338
  Top Layer w0.2: 2.9@17.17,67.003 v1(17.17,73.482) ; 8.9@31.27,66.901 v1@31.27,73.454 ; 11.9@45.237,66.966 v1(45.237,73.457) ; 3.9@59.334,66.901 v1(59.334,73.457) ; 6.9@73.254,67.013 v1(73.254,73.482) ; 12.9@87.3,67.003 v1(87.3,73.482) ; v1(101.397,73.482) 101.397,66.933 15.9@101.429,66.901 101.429,60.318 102.083,59.665 v1(102.083,58.318) ; v1(106.274,28.118) 106.341,28.05 106.341,25.83 U1.97@106.323,25.812 ; v1(115.443,73.482) 115.443,66.918 10.9@115.461,66.901 ; v1(129.464,73.482) 129.464,66.929 16.9@129.492,66.901 ; 5.9@143.524,66.901 143.739,67.115 v1(143.739,73.482) ; v1(157.505,73.431) 157.505,66.951 14.9@157.556,66.901 ; 7.9@171.587,66.901 171.602,66.916 v1(171.602,73.482) ; v1(185.471,73.482) 185.471,67.049 9.9@185.619,66.901 ; v1(199.492,73.482) 199.492,67.06 4.9@199.651,66.901 ; v1(213.563,73.508) 213.563,67.053 13.9@213.69,66.926
  Bottom Layer w0.2: v1(17.17,73.482) v1(31.242,73.482) v1@45.212,73.482 ; v1@45.237,73.482 v1(73.254,73.482) v1(87.3,73.482) v1(101.397,73.482) v1(115.443,73.482) v1(129.464,73.482) v1(143.739,73.482) v1(171.602,73.482) v1(185.471,73.482) v1(199.492,73.482) 213.538,73.482 v1(213.563,73.508) ; v1(102.083,58.318) 102.083,32.309 v1(106.274,28.118)
DIN1-3: C48.1 C49.1 K1.6 U7.3 | length 322.1
  Top Layer w0.5: C49.1@3.802,60.706 3.886,60.622 C48.1@3.886,58.928
  Top Layer w1: C48.1@3.886,58.928 v1(2.032,58.928) 4.233,56.727 U7.3@4.233,55.374
  VCC w1: v1(2.032,58.928) 1.016,57.912 1.016,9.906 9.398,1.524 158.496,1.524 175.006,18.034 175.006,44.45 v1(180.34,49.784)
  Bottom Layer w1: v1(180.34,49.784) 203.2,49.784 206.756,53.34 206.756,62.484 208.28,64.008 210.175,64.008 K1.6@213.817,60.366
"F CS": U1.73 U6.1 | length 12.8
  Top Layer w0.2: v1(91.186,23.114) 93.884,25.812 U1.73@94.323,25.812 ; v1(91.948,18.542) 91.948,15.824 U6.1@92.583,15.189
  Bottom Layer w0.2: v1(91.186,23.114) 91.186,19.304 v1(91.948,18.542)
"FIFO OE": 
"FIFO RCLK": U1.134
"FIFO RRST": 
"FIFO WEN": U1.133
"FIFO WRST": 
"FSMC A6": 12.11@88.57,76.203 U1.50 | length 39.1
  Top Layer w0.254: 12.11@88.57,76.203 v1(89.916,74.856) ; v1(90.297,39.345) 90.33,39.312 U1.50@91.823,39.312
  VCC w0.254: v1(89.916,74.856) 89.916,39.726 v1(90.297,39.345)
"FSMC A7": 15.11@102.699,76.101 U1.53 | length 44.7
  Top Layer w0.2: U1.53@91.823,37.812 93.329,37.812 v1(93.345,37.795)
  Top Layer w0.254: 15.11@102.699,76.101 102.699,76.092 v1(103.886,74.905)
  VCC w0.254: v1(93.345,37.795) 103.886,48.336 v1@103.886,74.93
"FSMC A8": 4.11@200.921,76.101 U1.54 | length 136.6
  Top Layer w0.2: U1.54@91.823,37.312 91.849,37.338 93.024,37.338 93.117,37.245 93.573,37.245 93.666,37.338 v1(94.158,37.338) ; v1(197.358,58.318) 200.66,58.318 202.209,59.868 202.209,74.812 4.11@200.921,76.101
  VCC w0.254: v1(94.158,37.338) 94.201,37.382 104.884,37.382 v1(104.953,37.313)
  Bottom Layer w0.254: v1(104.953,37.313) 105.159,37.313 124.463,56.617 190.779,56.617 192.481,58.318 v1(197.358,58.318)
"FSMC A9": 7.11@172.857,76.101 U1.55 | length 109.6
  Top Layer w0.2: U1.55@91.823,36.812 93.338,36.812 93.362,36.788 101.66,36.788 v1(103.505,38.633) ; 7.11@172.857,76.101 174.126,74.832 v5(174.126,58.251)
  Bottom Layer w0.2: v1@103.48,38.557 123.173,58.251 v5(174.126,58.251)
"FSMC A10": Designator141.2 U1.56 | length 31.3
  Top Layer w0.2: Designator141.2@69.367,55.753 70.82,54.3 72.358,54.3 72.995,53.663 72.995,52.373 80.827,44.54 82.098,44.54 90.327,36.312 U1.56@91.823,36.312
"FSMC A11": 10.11@116.731,76.101 U1.57 | length 65.2
  Top Layer w0.2: U1.57@91.823,35.812 v1@93.368,35.812
  Top Layer w0.254: 10.11@116.731,76.101 117.754,75.077 v1(117.754,74.727)
  VCC w0.254: v1(93.421,35.865) 93.541,35.745 115.163,35.745 117.754,38.336 v1(117.754,74.727)
"FSMC A12": 13.11@214.96,76.126 U1.87 | length 150.3
  Top Layer w0.2: v1@101.323,24.335 U1.87@101.323,25.812 ; v1(116.725,26.142) 122.408,26.142 126.492,30.226 126.492,49.53 127.254,50.292 v1(160.782,50.292) ; v1(214.96,71.933) 13.11@214.96,76.126
  Bottom Layer w0.2: v1(101.321,24.333) 114.917,24.333 v1(116.725,26.142) ; v1(160.782,50.292) 164.109,53.619 195.097,53.619 212.801,71.323 214.351,71.323 v1(214.96,71.933)
"FSMC A13": 16.11 U1.88 | length 64.9
  Top Layer w0.254: U1.88@101.823,25.812 101.823,35.613 127.678,61.468 130.477,61.468 131.978,62.97 131.978,74.885 16.11@130.762,76.101
"FSMC A14": U1.89
"FSMC A15": U1.90
"FSMC A16": U1.80
"FSMC A17": U1.81
"FSMC A18": U1.82
"FSMC D0": Designator141.6 U1.85 | length 42.7
  Top Layer w0.254: v1(100.279,28.27) 100.33,28.219 U1.85@100.33,25.819
  GND w0.254: Designator141.6@69.367,50.673 70.793,49.247 72.369,49.247 93.346,28.27 v1(100.279,28.27)
"FSMC D1": Designator141.7 U1.86 | length 39.5
  Top Layer w0.254: U1.86@100.823,25.812 100.823,26.801 101.067,27.045 v1(101.067,27.432)
  GND w0.254: Designator141.7@71.907,48.133 92.608,27.432 v1(101.067,27.432)
"FSMC D2": Designator141.8 U1.114 | length 57.1
  Top Layer w0.2: v1(107.62,30.15) 108.282,30.812 U1.114@114.323,30.812
  VCC w0.254: v1(92.913,25.908) 97.155,30.15 v1(107.62,30.15)
  GND w0.254: Designator141.8@69.367,48.133 70.793,46.707 70.793,45.131 71.446,44.479 72.38,44.479 90.95,25.908 v1(92.913,25.908)
"FSMC D3": Designator141.9 U1.115 | length 51.8
  Top Layer w0.2: v1(106.179,31.312) U1.115@114.323,31.312
  VCC w0.254: v1(91.694,27.102) 93.327,28.735 94.963,28.735 97.54,31.312 v1(106.179,31.312)
  GND w0.254: Designator141.9@71.907,45.593 90.399,27.102 v1(91.694,27.102)
"FSMC D4": Designator141.10 U1.58 | length 26.7
  Top Layer w0.2: Designator141.10@69.367,45.593 70.82,44.14 81.933,44.14 90.762,35.312 U1.58@91.823,35.312
"FSMC D5": Designator141.11 U1.59 | length 23.3
  Top Layer w0.2: Designator141.11@71.907,43.053 82.454,43.053 90.696,34.812 U1.59@91.823,34.812
"FSMC D6": Designator141.12 U1.60 | length 26.1
  Top Layer w0.2: Designator141.12@69.367,43.053 70.82,41.6 81.596,41.6 88.885,34.312 U1.60@91.823,34.312
"FSMC D7": Designator141.13 U1.63 | length 23.1
  Top Layer w0.2: Designator141.13@71.907,40.513 82.118,40.513 89.847,32.785 91.796,32.785 U1.63@91.823,32.812
"FSMC D8": Designator141.14 U1.64 | length 25.9
  Top Layer w0.2: Designator141.14@69.367,40.513 70.37,40.513 71.822,39.06 82.86,39.06 89.608,32.312 U1.64@91.823,32.312
"FSMC D9": Designator141.15 U1.65 | length 22.5
  Top Layer w0.2: Designator141.15@71.907,37.973 72.873,37.008 84.125,37.008 89.321,31.812 U1.65@91.823,31.812
"FSMC D10": Designator141.16 U1.66 | length 25.2
  Top Layer w0.2: Designator141.16@69.367,37.973 70.37,37.973 71.822,36.52 83.857,36.52 89.066,31.312 U1.66@91.823,31.312
"FSMC D11": Designator141.17 U1.67 | length 21.8
  Top Layer w0.2: Designator141.17@71.907,35.433 84.379,35.433 89,30.812 U1.67@91.823,30.812
"FSMC D12": Designator141.18 U1.68 | length 24.6
  Top Layer w0.2: Designator141.18@69.367,35.433 70.37,35.433 71.822,33.98 85.266,33.98 88.934,30.312 U1.68@91.823,30.312
"FSMC D13": Designator141.19 U1.77 | length 27.9
  Top Layer w0.2: Designator141.19@71.907,32.893 85.471,32.893 90.479,27.885 95.201,27.885 96.323,26.763 U1.77@96.323,25.812
"FSMC D14": Designator141.20 U1.78 | length 32.4
  Top Layer w0.2: Designator141.20@69.367,32.893 70.37,32.893 71.457,31.806 82.875,31.806 v1(90.106,24.575) ; v1(96.799,24.409) 96.823,24.433 U1.78@96.823,25.812
  Bottom Layer w0.2: v1(90.106,24.575) 96.634,24.575 v1(96.799,24.409)
"FSMC D15": Designator141.21 U1.79 | length 30.2
  Top Layer w0.2: Designator141.21@71.907,30.353 83.261,30.353 v1(89.713,23.901) ; U1.79@97.323,25.812 97.349,25.785 97.349,23.816 v1(97.333,23.8)
  Bottom Layer w0.2: v1(89.713,23.901) 89.755,23.859 97.273,23.859 v1(97.333,23.8)
"FSMC NE3": 
"FSMC NE4": Designator141.1 U1.127 | length 50.1
  Top Layer w0.254: v1(112.217,38.354) 113.26,37.312 U1.127@114.323,37.312
  GND w0.254: Designator141.1@71.907,55.753 94.818,55.753 v1(112.217,38.354)
"FSMC NOE": Designator141.4 U1.118 | length 55
  Top Layer w0.254: v1(111.709,34.417) 111.894,34.232 111.894,33.111 112.232,32.773 114.284,32.773 U1.118@114.323,32.812
  GND w0.254: Designator141.4@69.367,53.213 70.331,53.213 71.446,54.327 91.824,54.327 111.709,34.442 v1(111.709,34.417)
"FSMC NWE": Designator141.3 U1.119 | length 50.6
  Top Layer w0.254: v1(112.471,33.35) 114.284,33.35 U1.119@114.323,33.312
  GND w0.254: Designator141.3@71.907,53.213 91.11,53.213 99.042,45.281 99.042,45.227 99.38,44.889 99.434,44.889 110.973,33.35 v1@112.42,33.35
GBUF: 